# Altium PCB PCB_2021-10-31.pcbdoc
Units mil, origin at the board's own origin, x right, y up, seen from the top; angles counter-clockwise.
Board outline 7210 x 4310 mil, 2 copper layers (Top Layer, Bottom Layer); 61 components, 79 nets, 209 pads, 50 vias.
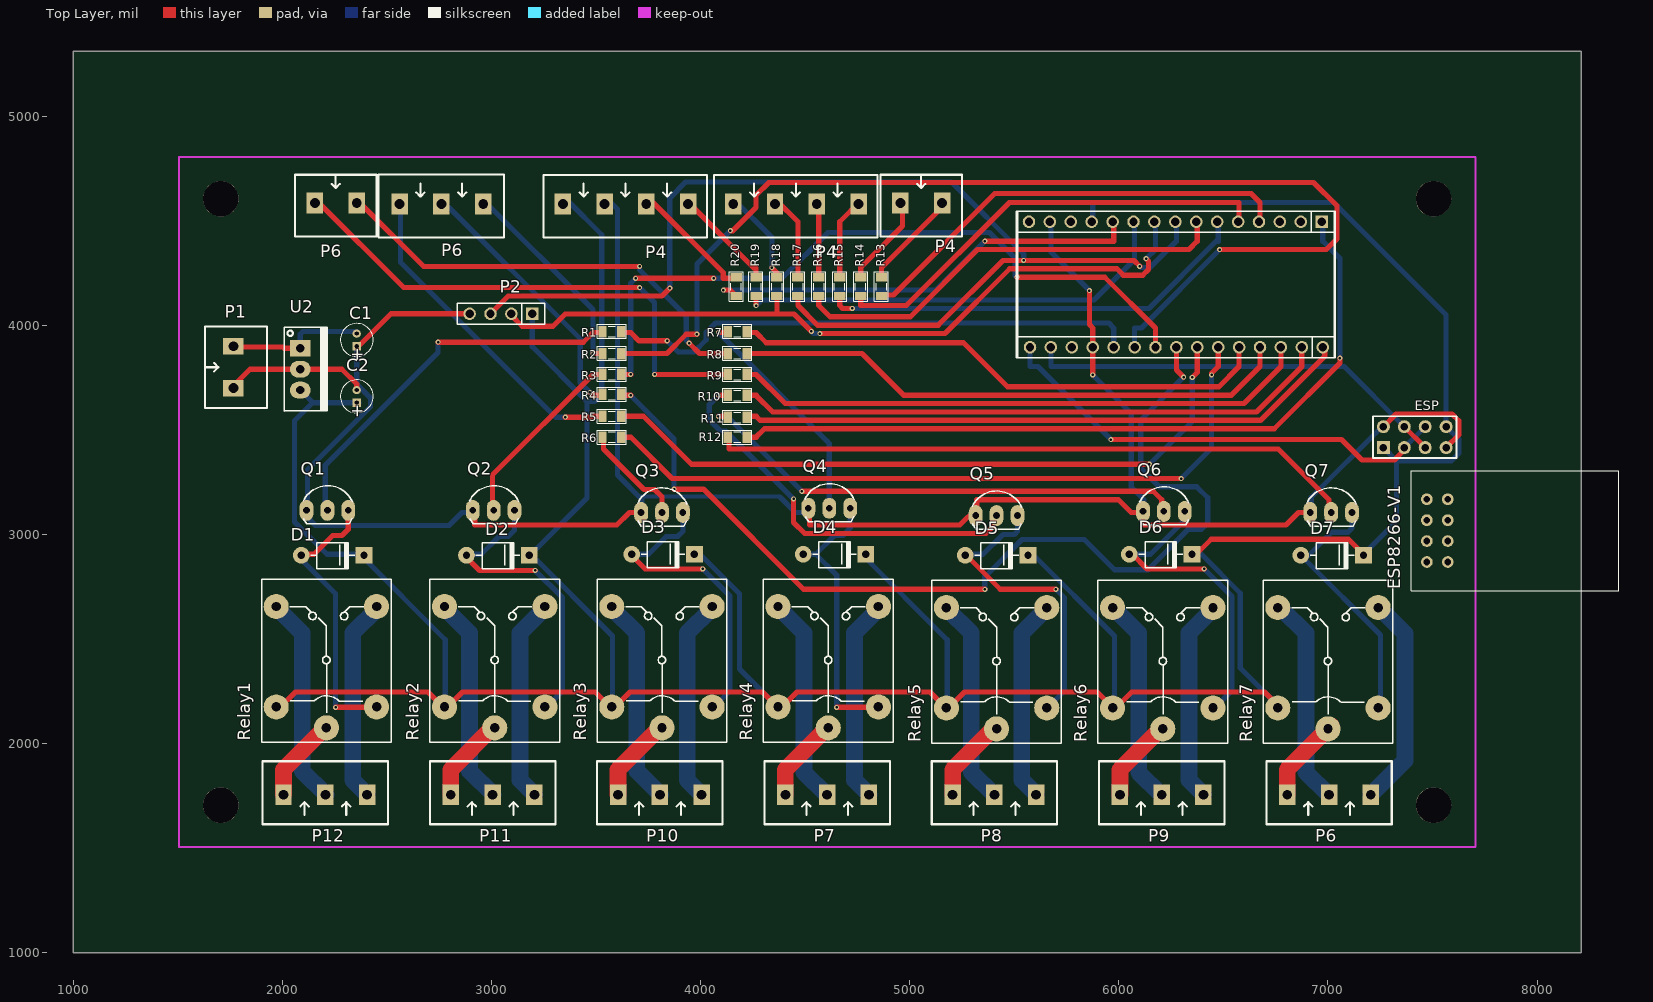
[diagram p0: Top Layer view]
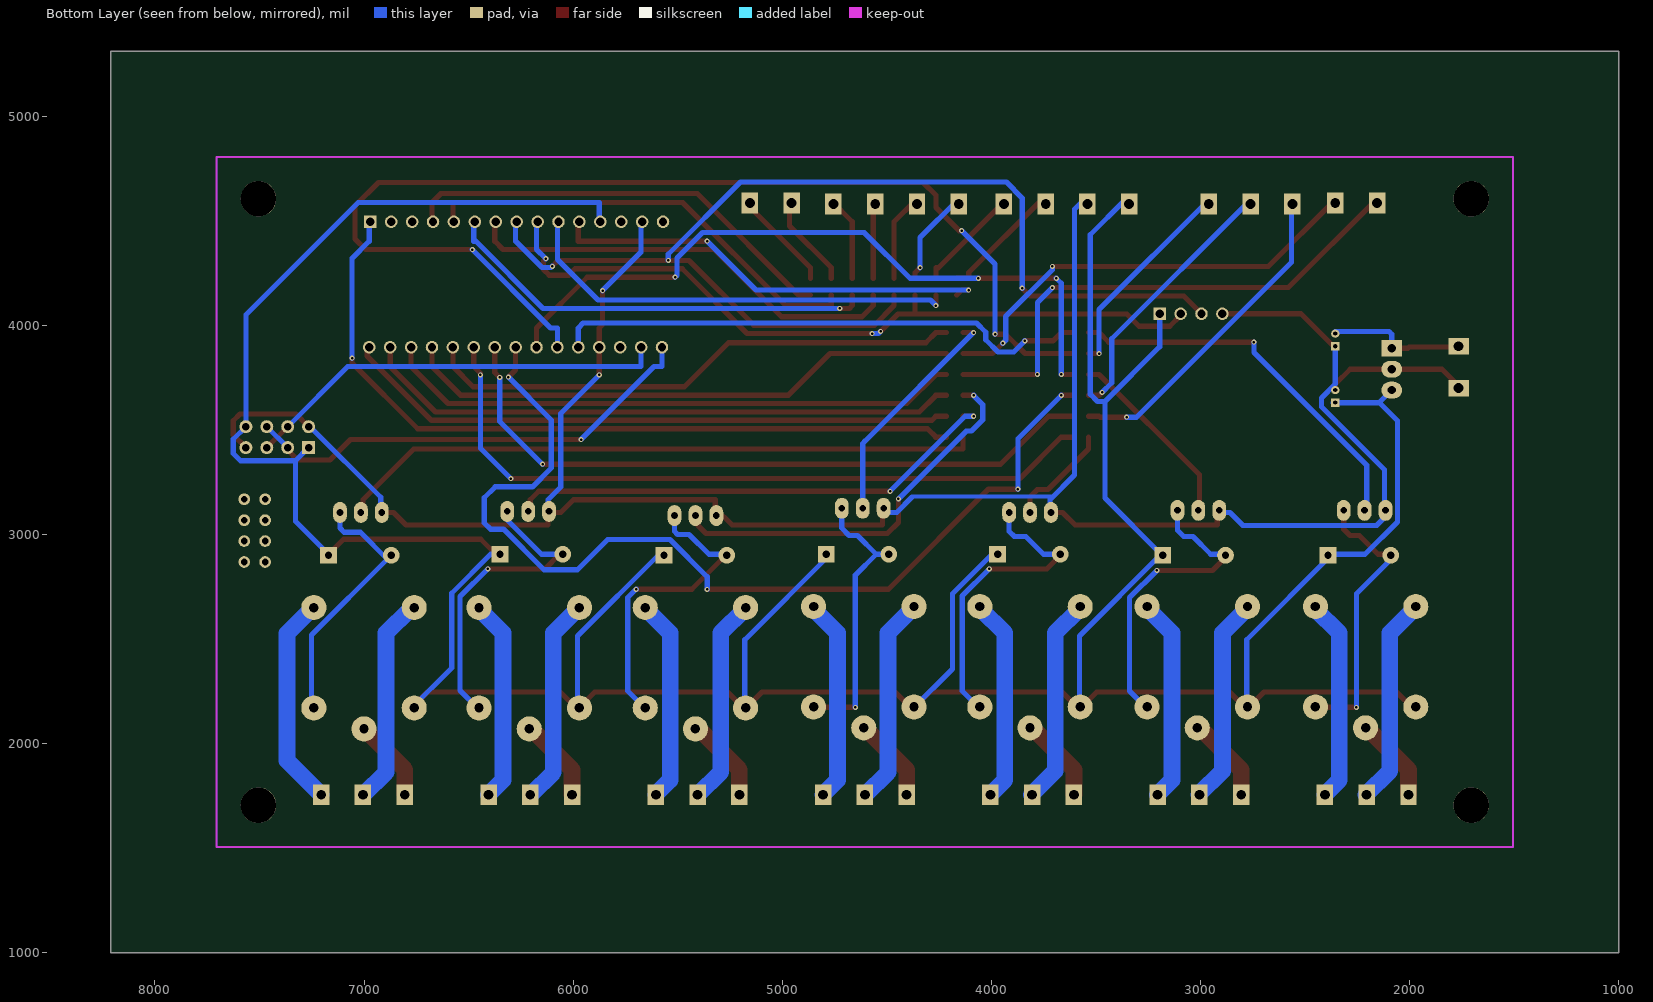
[diagram p1: Bottom Layer view, seen from below]

## Layer stack, top to bottom
Top Solder: solder mask 0.4, Solder Resist, Dk 3.5
Top Layer: signal copper 1.4
Dielectric1: dielectric 12.6, FR-4, Dk 4.8
Bottom Layer: signal copper 1.4
Bottom Solder: solder mask 0.4, Solder Resist, Dk 3.5

## Board outline
8210,1000 1000,1000 1000,5310 8210,5310

## Design rules (kind name [scope] priority, off if disabled: settings)
Clearance [All] p1: gap=10
PolygonConnect [All] p1: connectstyle=Relief reliefconductorwidth=10 reliefentries=4 polygonreliefangle="90 Angle" airgapwidth=10
RoutingVias [All] p1: holewidth=28 width=50 viastyle="Through Hole" minholewidth=28 minwidth=50 maxholewidth=28 maxwidth=50
SolderMaskExpansion [All] p1: expansion=4
Width [All] p1: maxlimit=10 minlimit=10 preferedwidth=10
30 further rules are at their usual default settings.

## Components (designator, comment, footprint, x,y, rotation, side; value= is the part's Value field where it differs from the comment)
C1 "Comment" CA-ALU-4 2355,3930 r90 top
C2 "Comment" CA-ALU-4 2355,3660 r90 top
D1 "Comment" DIO-1A-SMALL 2040,2900 r180 top
D2 "Comment" DIO-1A-SMALL 2830,2900 r180 top
D3 "Comment" DIO-1A-SMALL 3620,2905 r180 top
D4 "Comment" DIO-1A-SMALL 4440,2905 r180 top
D5 "Comment" DIO-1A-SMALL 5215,2900 r180 top
D6 "Comment" DIO-1A-SMALL 6000,2905 r180 top
D7 "Comment" DIO-1A-SMALL 6820,2900 r180 top
ESP "Header2X4P 2.54mm" HDR-4X2/2.54 7265,3415 r0 top
ESP8266-V1 "Comment" ESP8266 7530,3020 r90 top
P1 "Comment" "Medium - Header 2" 1765,3800 r90 top
P2 "Comment" JP4-C1T 3195,4055 r180 top
P4 "Comment" "Medium - Header 2" 5055,4585 r0 top
P4 "Comment" "Medium - Header 4" 4755,4580 r180 top
P4 "Comment" "Medium - Header 4" 3940,4580 r180 top
P6 "Comment" "Medium - Header 2" 2255,4585 r0 top
P6 "Comment" "Medium - Header 3" 2960,4580 r180 top
P6 "Comment" "Medium - Header 3" 6805,1755 r0 top
P7 "Comment" "Medium - Header 3" 4405,1755 r0 top
P8 "Comment" "Medium - Header 3" 5205,1755 r0 top
P9 "Comment" "Medium - Header 3" 6005,1755 r0 top
P10 "Comment" "Medium - Header 3" 3605,1755 r0 top
P11 "Comment" "Medium - Header 3" 2805,1755 r0 top
P12 "Comment" "Medium - Header 3" 2005,1755 r0 top
Q1 "Comment" TO92-123 2215,3115 r0 top
Q2 "Comment" TO92-123 3010,3115 r0 top
Q3 "Comment" TO92-123 3815,3105 r0 top
Q4 "Comment" TO92-123 4615,3125 r0 top
Q5 "Comment" TO92-123 5415,3090 r0 top
Q6 "Comment" TO92-123 6215,3110 r0 top
Q7 "Comment" TO92-123 7015,3105 r0 top
R1 "Comment" RES-SMD-0805 3575,3970 r180 top
R2 "Comment" RES-SMD-0805 3575,3865 r180 top
R3 "Comment" RES-SMD-0805 3575,3765 r180 top
R4 "Comment" RES-SMD-0805 3575,3670 r180 top
R5 "Comment" RES-SMD-0805 3575,3565 r180 top
R6 "Comment" RES-SMD-0805 3575,3465 r180 top
R7 "Comment" RES-SMD-0805 4175,3970 r180 top
R8 "Comment" RES-SMD-0805 4175,3865 r180 top
R9 "Comment" RES-SMD-0805 4175,3765 r180 top
R10 "Comment" RES-SMD-0805 4175,3665 r180 top
R11 "Comment" RES-SMD-0805 4175,3560 r180 top
R12 "Comment" RES-SMD-0805 4175,3465 r180 top
R13 "Comment" RES-SMD-0805 4865,4185 r270 top
R14 "Comment" RES-SMD-0805 4765,4185 r270 top
R15 "Comment" RES-SMD-0805 4665,4185 r270 top
R16 "Comment" RES-SMD-0805 4565,4185 r270 top
R17 "Comment" RES-SMD-0805 4465,4185 r270 top
R18 "Comment" RES-SMD-0805 4365,4185 r270 top
R19 "Comment" RES-SMD-0805 4265,4185 r270 top
R20 "Comment" RES-SMD-0805 4170,4185 r270 top
Relay1 "Comment" "RELAY 5" 2210,2400 r90 top
Relay2 "Comment" "RELAY 5" 3015,2400 r90 top
Relay3 "Comment" "RELAY 5" 3815,2400 r90 top
Relay4 "Comment" "RELAY 5" 4610,2400 r90 top
Relay5 "Comment" "RELAY 5" 5415,2395 r90 top
Relay6 "Comment" "RELAY 5" 6210,2395 r90 top
Relay7 "Comment" "RELAY 5" 7000,2395 r90 top
U2 "Comment" TO220-123 2085,3890 r270 top
? "Comment" "Arduino nano" 6265,4225 r90 top

## Footprints (in the part's own frame and the unit in brackets; to place one, negate y for a bottom-side part, rotate by r counter-clockwise, add the part's x,y. Pads: shape width x height; smd on the part's side, far side on the other; paste and mask are expansions set on the pad)
"Arduino nano" [mm]
  round 1.52 hole 1.02: 3V3(6.858,-15.367) 5V(6.858,10.033) A0(6.858,-10.287) A1(6.858,-7.747) A2(6.858,-5.207) A3(6.858,-2.667) A4(6.858,-0.127) A5(6.858,2.413) A6(6.858,4.953) A7(6.858,7.493) D2(-8.382,7.366) D3(-8.382,4.826) D4(-8.382,2.286) D5(-8.382,-0.254) D6(-8.382,-2.794) D7(-8.382,-5.334) D8(-8.382,-7.874) D9(-8.382,-10.414) D10(-8.382,-12.954) D11(-8.382,-15.494) D12(-8.382,-18.034) GND(-8.382,9.906) GND(6.858,15.113) REF(6.858,-12.827) RST(-8.382,12.446) RST(6.858,12.573) RX0(-8.382,14.986) TX1(-8.382,17.526) VIN(6.858,17.653)
  rect 1.52x1.52 hole 1.02: D13(6.858,-17.907)
  silkscreen extent -9.65,-19.55 8.13,19.18, body extent -9.65,-23.48 8.14,21.44, height 21.18
CA-ALU-4 [mm] "Polarized capacitors, Aluminum Electrolytic Capacitors, 2-Leads, Body 5x11x2x0.5"
  rect 1x1 hole 0.5: 1(-0.762,0)
  round 1 hole 0.5: 2(0.762,0)
  silkscreen extent -2,-2 2,2, body extent -2,-1.97 2,2.03, height 7.5
DIO-1A-SMALL [mil] "Diode 1A, W 100mil, L 350mil"
  round 80 hole 35: 1(-50,0)
  rect 80x80 hole 35: 2(-350,0)
  silkscreen extent -305,-61 -95,65, body extent -366,-61 -34,65, height 122
ESP8266 [mil]
  round 56 hole 32: 1(148,57) 2(48,57) 3(-52,57) 4(-152,57) 5(-152,-43) 6(-52,-43) 7(48,-43) 8(148,-43)
  silkscreen extent -290,-860 285,132, body extent -290,-858 281,118, height 566
HDR-4X2/2.54 [mil]
  rect 62x62 hole 35: 1(0,0)
  round 62 hole 35: 2(0,100) 3(100,0) 4(100,100) 5(200,0) 6(200,100) 7(300,0) 8(300,100)
  silkscreen extent -50,-50 350,150
JP4-C1T [mm] "4 row, straight, gold plating"
  rect 1.52x1.52 hole 1.02: 1(0,0)
  round 1.52 hole 1.02: 2(2.54,0) 3(5.08,0) 4(7.62,0)
  silkscreen extent -1.52,-1.27 9.14,1.27, body extent -1.52,-1.25 9.14,1.25, height 8.51
"Medium - Header 2" [mm]
  rect 2x2.5 hole 1.2: 1(-2.54,0) 2(2.54,0)
  silkscreen extent -4.95,-4.08 4.95,3.43, body extent -5,-4.07 5,3.43, height 10
"Medium - Header 3" [mm]
  rect 2x2.5 hole 1.2: 1(0,0) 2(5.08,0) 3(10.147,0)
  silkscreen extent -2.54,-3.58 12.7,4.06, body extent -2.42,-3.51 12.58,3.99, height 10
"Medium - Header 4" [mm]
  rect 2x2.5 hole 1.2: 1(0,0) 2(5.08,0) 3(10.147,0) 4(15.215,0)
  silkscreen extent -2.29,-3.53 17.58,4.06, body extent -2.36,-3.43 17.64,4.07, height 10
"RELAY 5" [mil] "Reley DPDT, 8 pin, 1A, W400mil, L800mil,H 300mil"
  round 120 hole 45: 1(-325,0) 2(255,240) 3(255,-240) 4(-225,-240) 5(-225,240)
  silkscreen extent -395,-310 385,310, body extent -371,-304 381,306, height 602
RES-SMD-0805 [mil]
  rect 39.37x55 smd: 1(-45,0) 2(45,0)
  silkscreen extent -70,-34 70,33, body extent -39,-25 39,25, height 31
TO92-123 [mil] "TO-92"
  oval 66x100 hole 32: 1(-100,0) 2(0,0) 3(100,0)
  silkscreen extent -117,-65 120,118, body extent -109,-66 109,95, height 245
TO220-123 [mil] "TO-220 - 1-2-3"
  rect 80x100 hole 39: 1(0,0)
  oval 80x100 hole 39: 2(100,0) 3(200,0)
  silkscreen extent -100,-76 300,130, body extent -95,-80 295,97, height 323

## Free pads (board coordinates)
  round 170 hole 170 unplated: ""(1705,1705) ""(1705,4605) ""(7505,1705) ""(7505,4605)

## Via types
v1: diameter 24, hole 12, Top Layer to Bottom Layer, 50 vias

## Nets (pads, with @x,y where several pads share a name; then routed paths per layer and width w, separated by ;. In a path a pad name is that pad's centre, name@x,y a point inside that pad or via, vN(x,y) a via of type N, cw(c..) or ccw(c..) an arc to the next point about the centre after c; other vN are vias at no path point)
$BOARDOUTLINENET: 
+5V: ESP.1 ESP.8 | length 18924.6
  Top Layer w25: 1978.8,2163.7 2062,2246.9 2695.6,2246.9 2778.8,2163.7 2861.4,2246.3 3496.2,2246.3 3578.8,2163.7 3661.4,2246.3 4296.2,2246.3 4378.8,2163.7 4461.4,2246.3 5096.2,2246.3 5178.8,2163.7 5261.4,2246.3 5896.2,2246.3 5978.8,2163.7 6061.4,2246.3 6696.2,2246.3 6778.8,2163.7 ; 6370,2905 6442,2977 7098,2977 7170,2905
  Bottom Layer w25: 2085,3690 2145,3630 ; 2365,3630 2145,3630 ; 2778.8,2163.7 2778.8,2496.2 2370,2905 2213.2,2905 2058.2,3060 2058.2,3543.2 2145,3630 ; 3170,2905 3188,2905 ; 3195,4055 3195,3897.3 3456.7,3635.6 ; 3365,4595 3526.7,4433.3 3526.7,3670.6 3491.7,3635.6 3456.7,3635.6 ; 3578.8,2163.7 3578.8,2514.2 3188,2905 ; 3970,2905 3996.5,2905 4185.6,2716 4185.6,2356.9 4378.8,2163.7 ; 4770,2905 5178.8,2496.2 5178.8,2163.7 ; 5570,2905 5588,2905 5978.8,2514.2 5978.8,2163.7 ; 5875,4494.9 5875,4587.5 7027.8,4587.5 7565,4050.3 ESP.8 7625,3455 7625,3386.4 7590.7,3352.1 7327.9,3352.1 ; 6370,2905 6394.6,2905 6580.8,2718.8 6580.8,2361.7 6778.8,2163.7 ; 7170,2905 7327.9,3062.9 7327.9,3352.1 ; ESP.1 7327.9,3352.1 ; 3188,2905 3456.7,3173.7 3456.7,3635.6
GND: ESP.2 ESP.7 | length 11741.7
  Top Layer w25: 1755,3700 1845,3790 2283.7,3790 2355,3718.7 2355,3690 ; 2355,3891.2 2518.8,4055 2895,4055 ; 2920,3105 2920,3044.4 3598.8,3044.4 3659.4,3105 3720,3105 ; 4520,3105 4520,3044.4 5239.1,3044.4 5320,3125.3 ; 5320,3105 5320,3125.3 ; v1(5859,4165.7) 5859,4003.5 5875,3987.5 v1(5875,3762.3) ; 6920,3105 6859.4,3105 6798.8,3044.4 6120,3044.4 6120,3105 6059.4,3105 5998.8,3165.6 5320,3165.6 5320,3125.3 ; ESP.2 7325.9,3575.9 7592.8,3575.9 7625,3543.6 7625,3475 ESP.7
  Bottom Layer w20: 3705,3180.6 4376.5,3180.6
  Bottom Layer w25: 2355,3891.2 2355,3718.7 2421.3,3652.4 2421.3,3610.1 2120,3308.8 2120,3080 2157.2,3042.8 2797.2,3042.8 2859.4,3105 2920,3105 ; 3561.8,4595 3601.9,4554.9 3601.9,3283.7 3720,3165.6 3720,3105 ; 4378.55,3178.55 4452.1,3105 4520,3105 ; 5675,4494.9 5675,4349.8 v1(5859,4165.7) ; v1(5875,3762.3) 6059.2,3578 6059.2,3226.4 6120,3165.6 6120,3105 ; 6920,3105 6920,3177.5 7257.5,3515 ESP.2
R1_1:  | length 1847.1
  Top Layer w25: v1(2744.3,3919) 3438.6,3919 3484.6,3965 3535,3965
  Bottom Layer w25: 2205,3105 2205,3331.2 2744.3,3870.5 v1(2744.3,3919)
R2_1:  | length 995.6
  Top Layer w25: v1(3484.6,3865) 3535,3865
  Bottom Layer w25: 2965,4595 3484.6,4075.4 v1(3484.6,3865)
R3_1:  | length 909.1
  Top Layer w25: 3005,3105 3005,3285.4 3484.6,3765 3535,3765
R4_1:  | length 1278.8
  Top Layer w25: v1(3470.1,3679) 3470.6,3679 3484.6,3665 3535,3665
  Bottom Layer w25: 2765,4595 3424.2,3935.8 3424.2,3724.9 v1(3470.1,3679)
R5_1:  | length 1572.7
  Top Layer w25: v1(3352.8,3560.3) 3479.9,3560.3 3484.6,3565 3535,3565
  Bottom Layer w25: 2565,4595 2565,4301.1 3305.9,3560.3 v1(3352.8,3560.3)
R6_1:  | length 506.1
  Top Layer w25: 3535,3465 3535,3408.5 3728.5,3215 3780,3215 3815,3180 3815,3105
R7_1:  | length 1116.9
  Top Layer w25: v1(4084.9,3965) 4135,3965
  Bottom Layer w25: v1(4084.9,3965) 4605,3444.9 ; 4599.9,3450 4615,3434.9 4615,3125
R8_1:  | length 2151.8
  Top Layer w25: 2361.8,4595 2675.4,4281.4 v1(3708,4281.4) ; v1(3945,3914.2) 3994.2,3865 4135,3865
  Bottom Layer w25: v1(3708,4281.4) 3708,4265.5 3931.5,4042 3931.5,3927.7 v1(3945,3914.2)
R9_1:  | length 2515
  Top Layer w25: 2165,4595 2579.9,4180.1 v1(3708,4180.1) ; v1(3779.7,3765) 4135,3765
  Bottom Layer w25: v1(3708,4180.1) 3779.7,4108.4 v1(3779.7,3765)
R10_1:  | length 1917.1
  Top Layer w25: v1(4084.6,3665) 4135,3665 ; v1(4444.4,3169.4) 4444.4,3057.2 4497.5,3004.2 5364.8,3004.2 5405,3044.4 5405,3105
  Bottom Layer w25: v1(4084.6,3665) 4041.5,3621.8 4041.5,3547.7 4094.7,3494.5 4119.4,3494.5 v1(4444.4,3169.4)
R11_1:  | length 2396
  Top Layer w25: v1(4085,3565) 4135,3565 ; v1(4484.2,3206) 6164.6,3206 6205,3165.6 6205,3105
  Bottom Layer w25: v1(4085,3565) 4125.2,3565 v1(4484.2,3206)
R12_1:  | length 3087.7
  Top Layer w25: 4135,3465 4135,3408.5 6762.1,3408.5 7005,3165.6 7005,3105
R13_2:  | length 494.3
  Top Layer w25: 4865,4225 4865,4275.4 5165,4575.4 5165,4595
R14_2:  | length 452.8
  Top Layer w25: 4765,4225 4765,4275.4 4965,4475.4 4965,4595
R15_2:  | length 411.4
  Top Layer w25: 4665,4225 4665,4495 4765,4595
R16_2:  | length 370
  Top Layer w25: 4565,4225 4565,4595
R17_2:  | length 411.4
  Top Layer w25: 4365,4595 4465,4495 4465,4225
R18_2:  | length 452.8
  Top Layer w25: v1(4340.7,4275.3) 4365,4250.9 4365,4225
  Bottom Layer w25: 4165,4595 4340.7,4419.3 v1(4340.7,4275.3)
R19_2:  | length 501.6
  Top Layer w25: 3965,4595 3965,4562.8 4252.4,4275.4 4265,4275.4 4265,4225
R20_2:  | length 568.8
  Top Layer w25: 3765,4595 4108.5,4251.5 4108.5,4225 4165,4225
RELAY1_1:  | length 1400.9
  Top Layer w25: 2065,2905 2150.6,2905 2240.6,2995 2285,2995 2315,3025 2315,3115 ; v1(2254.1,2173.1) 2441.8,2173.1 2451.2,2163.7
  Bottom Layer w25: 2065,2905 2254.1,2715.9 v1(2254.1,2173.1)
RELAY1_2:  | length 965.7
  Bottom Layer w80: 2405,1755 2335.6,1824.4 2335.6,2528.4 2451.2,2644.1
RELAY1_3:  | length 984.1
  Bottom Layer w80: 1978.8,2644.1 2094.4,2528.5 2094.4,1868.8 2208.2,1755
RELAY1_5:  | length 417
  Top Layer w80: 2005,1755 2005,1875 2215,2085
RELAY2_1:  | length 1507.4
  Top Layer w25: 2865,2905 2942.1,2827.9 v1(3208.4,2827.9)
  Bottom Layer w25: 2865,2905 2950.6,2905 3035.6,2990 3080,2990 3110,3020 3110,3105 ; v1(3208.4,2827.9) 3338.7,2697.5 3338.7,2251.2 3251.2,2163.7
RELAY2_2:  | length 965.7
  Bottom Layer w80: 3205,1755 3135.6,1824.4 3135.6,2528.4 3251.2,2644.1
RELAY2_3:  | length 984.1
  Bottom Layer w80: 2778.8,2644.1 2894.4,2528.5 2894.4,1868.8 3008.2,1755
RELAY2_5:  | length 417
  Top Layer w80: 2805,1755 2805,1875 3015,2085
RELAY3_1:  | length 1520.9
  Top Layer w25: 3665,2905 3735.1,2834.9 v1(4009.9,2834.9)
  Bottom Layer w25: 3665,2905 3750.6,2905 3835.6,2990 3890,2990 3915,3015 3915,3105 ; v1(4009.9,2834.9) 4139.5,2705.2 4139.5,2252 4051.2,2163.7
RELAY3_2:  | length 965.7
  Bottom Layer w80: 4005,1755 3935.6,1824.4 3935.6,2528.4 4051.2,2644.1
RELAY3_3:  | length 984.1
  Bottom Layer w80: 3578.8,2644.1 3694.4,2528.5 3694.4,1868.8 3808.2,1755
RELAY3_5:  | length 417
  Top Layer w80: 3605,1755 3605,1875 3815,2085
RELAY4_1:  | length 1374.8
  Top Layer w25: v1(4650.3,2173.1) 4841.8,2173.1 4851.2,2163.7
  Bottom Layer w25: 4465,2905 4550.6,2905 ; v1(4650.3,2173.1) 4650.3,2805.3 4550.6,2905 ; 4715,3125 4715,3030 4680,2995 4640.6,2995 4550.6,2905
RELAY4_2:  | length 965.7
  Bottom Layer w80: 4805,1755 4735.6,1824.4 4735.6,2528.4 4851.2,2644.1
RELAY4_3:  | length 981.5
  Bottom Layer w80: 4378.8,2644.1 4494.4,2528.5 4494.4,1862.4 4601.8,1755
RELAY4_5:  | length 417
  Top Layer w80: 4405,1755 4405,1875 4615,2085
RELAY5_1:  | length 1500.3
  Top Layer w25: 5265,2905 5432.4,2737.6 v1(5698.6,2737.6)
  Bottom Layer w25: 5265,2905 5350.6,2905 5445.6,3000 5500,3000 5515,3015 5515,3090 ; 5651.2,2163.7 5738.7,2251.2 5738.7,2697.5 v1(5698.6,2737.6)
RELAY5_2:  | length 965.7
  Bottom Layer w80: 5605,1755 5535.6,1824.4 5535.6,2528.4 5651.2,2644.1
RELAY5_3:  | length 981.5
  Bottom Layer w80: 5178.8,2644.1 5294.4,2528.5 5294.4,1862.4 5401.8,1755
RELAY5_5:  | length 417
  Top Layer w80: 5205,1755 5205,1875 5415,2085
RELAY6_1:  | length 1479
  Top Layer w25: 6065,2905 6135.1,2834.9 v1(6408,2834.9)
  Bottom Layer w25: 6065,2905 6150.6,2905 6315,3069.4 6315,3095 ; v1(6408,2834.9) 6540.7,2702.2 6540.7,2253.2 6451.2,2163.7
RELAY6_2:  | length 965.7
  Bottom Layer w80: 6405,1755 6335.6,1824.4 6335.6,2528.4 6451.2,2644.1
RELAY6_3:  | length 981.5
  Bottom Layer w80: 5978.8,2644.1 6094.4,2528.5 6094.4,1862.4 6201.8,1755
RELAY6_5:  | length 417
  Top Layer w80: 6005,1755 6005,1875 6215,2085
RELAY7_1:  | length 1264.1
  Bottom Layer w25: 6865,2905 6888.8,2881.2 ; 7115,3105 7115,3030 7095,3010 7017.6,3010 6888.8,2881.2 ; 7251.2,2163.7 7251.2,2518.8 6888.8,2881.2
RELAY7_2:  | length 1005.2
  Bottom Layer w80: 7205,1755 7368.2,1918.1 7368.2,2527.1 7251.2,2644.1
RELAY7_3:  | length 981.5
  Bottom Layer w80: 6778.8,2644.1 6894.4,2528.5 6894.4,1862.4 7001.8,1755
RELAY7_5:  | length 417
  Top Layer w80: 6805,1755 6805,1875 7015,2085
U1_1: ESP.3 ESP.6 | length 2240.9
  Top Layer w25: v1(5961.9,3453.5) 7064.2,3453.5 7162.4,3355.3 7317.4,3355.3 7365,3402.9 ESP.3
  Bottom Layer w25: 5575.1,3895 5575.1,3802.4 5613,3802.4 v1(5961.9,3453.5) ; ESP.3 ESP.6
U1_2: ESP.4 ESP.5 | length 2043
  Top Layer w25: ESP.4 ESP.5
  Bottom Layer w25: 5675,3894.9 5675,3802.4 7077.6,3802.4 ESP.4
U1_3: 
U1_5:  | length 2578.3
  Top Layer w25: 3615,3965 3665.4,3965 3704.8,3925.6 v1(3839.8,3925.6)
  Bottom Layer w25: v1(3839.8,3925.6) 3893,3872.5 3967.9,3872.5 4026.6,3931.2 4026.6,3966.5 4070.6,4010.5 5952,4010.5 5975,3987.5 5975,3894.9
U1_6:  | length 5439.1
  Top Layer w25: 3615,3865 3839,3865 3931.1,3957.2 v1(3982.3,3957.2) ; v1(4142.2,4452.5) 4154.7,4452.5 4265,4562.8 4265,4622.2 4326.1,4683.4 6930.6,4683.4 7042.6,4571.3 7042.6,4412.9 6991.5,4361.9 v1(6482.1,4361.9)
  Bottom Layer w25: v1(3982.3,3957.2) 3982.3,4292.5 v1(4142.2,4452.5) ; 6075,3894.9 6075,3987.5 6107.7,3987.5 v1(6482.1,4361.9)
U1_7:  | length 3427.4
  Top Layer w25: 3615,3765 v1(3665.4,3765) ; v1(3689.3,4224.9) v1(4062.2,4224.9) ; v1(5512.2,4229.9) 5932.6,4229.9 6175,3987.5 6175,3894.9
  Bottom Layer w25: v1(3665.4,3765) 3665.4,4201 v1(3689.3,4224.9) ; v1(4062.2,4224.9) 4388.8,4224.9 4608.1,4444.3 5381,4444.3 5503.3,4322 5503.3,4238.8 v1(5512.2,4229.9)
U1_8:  | length 4797.7
  Top Layer w25: 3615,3665 v1(3665.4,3665) ; v1(3872.8,3216.3) 4013.6,3216.3 4492.2,2737.6 v1(5358.7,2737.6) ; 6275,3894.9 6275,3786 v1(6309.1,3751.9)
  Bottom Layer w25: v1(3665.4,3665) 3872.8,3457.6 v1(3872.8,3216.3) ; v1(5358.7,2737.6) 5358.7,2797 5537.2,2975.4 5834.7,2975.4 5979.5,2830.6 6139.3,2830.6 6333.7,3025 6395,3025 6425,3055 6425,3175 6372.7,3227.3 6276.9,3227.3 6194.4,3227.3 6104.4,3317.4 6104.4,3547.2 v1(6309.1,3751.9)
U1_9:  | length 3280.1
  Top Layer w25: 3615,3565 3726.4,3565 3955.6,3335.8 v1(6146.4,3335.8) ; v1(6350.9,3750.8) 6375,3775 6375,3894.9
  Bottom Layer w25: v1(6146.4,3335.8) 6350.9,3540.3 v1(6350.9,3750.8)
U1_10:  | length 3466.3
  Top Layer w25: 3615,3465 3665.4,3465 3863.4,3267 v1(6298.2,3267) ; v1(6443,3762.3) 6443,3770.4 6475,3802.4 6475,3894.9
  Bottom Layer w25: v1(6298.2,3267) 6443,3411.8 v1(6443,3762.3)
U1_11:  | length 2599.8
  Top Layer w25: 4215,3965 4265.4,3965 4313.6,3916.8 5256.9,3916.8 5467.8,3705.9 6478.5,3705.9 6575,3802.4 6575,3894.9
U1_12:  | length 2691.6
  Top Layer w25: 4215,3865 4771.5,3865 4970.7,3665.8 6538.4,3665.8 6675,3802.4 6675,3894.9
U1_13:  | length 2783.4
  Top Layer w25: 4215,3765 4265.4,3765 4404.7,3625.7 6598.3,3625.7 6775,3802.4 6775,3894.9
U1_14:  | length 2875.3
  Top Layer w25: 4215,3665 4265.4,3665 4344.9,3585.5 6658.1,3585.5 6875,3802.4 6875,3894.9
U1_15:  | length 2947.7
  Top Layer w25: 4215,3565 4265.4,3565 4285,3545.4 6677.9,3545.4 6985,3852.5 6985,3894.9
U1_16:  | length 3698.8
  Top Layer w25: 4215,3465 4265.4,3465 4305.7,3505.3 6743.4,3505.3 7057.3,3819.2 v1(7057.3,3842.5)
  Bottom Layer w25: 6975,4494.9 6975,4402.4 7057.3,4320.1 v1(7057.3,3842.5)
U1_17: 
U1_18: 
U1_19:  | length 2121
  Top Layer w25: 4865,4145 4921.5,4145 5406.4,4629.9 6632.6,4629.9 6675,4587.5 6675,4494.9
U1_20:  | length 2157.2
  Top Layer w25: 4765,4145 4765,4094.6 4983.2,4094.6 5476.1,4587.5 6575,4587.5 6575,4494.9
U1_21:  | length 2092
  Top Layer w25: 4665,4145 4665,4094.6 4679,4080.6 v1(4724.9,4080.6)
  Bottom Layer w25: v1(4724.9,4080.6) 6144.1,4080.6 6465.9,4402.4 6475,4402.4 6475,4494.9
U1_22:  | length 2125.2
  Top Layer w25: 4565,4145 4565,4094.6 4619.1,4040.5 5002.8,4040.5 5324.6,4362.3 6334.9,4362.3 6375,4402.4 6375,4494.9
U1_23:  | length 5422.5
  Top Layer w25: 2995,4055 3080,4140 3815,4140 v1(3852.6,4177.6) ; 4465,4145 4465,4094.6 4559.2,4000.4 5135.7,4000.4 5445.5,4310.2 v1(5544.8,4310.2) 6071.6,4310.2 v1(6099.5,4282.2)
  Bottom Layer w25: v1(3852.6,4177.6) 3852.6,4609.2 3928,4684.6 5199.9,4684.6 5544.8,4339.6 v1(5544.8,4310.2) ; v1(6099.5,4282.2) 6105.6,4276.1 6148.8,4276.1 6275,4402.4 6275,4494.9
U1_24:  | length 3634
  Top Layer w25: 3095,4055 3095,4046.5 3146.4,3995.1 3293.7,3995.1 3352.1,4053.5 4365,4053.5 ; 4365,4145 4365,4094.6 4365,4053.5 ; v1(4529.9,3970.4) 4446.9,4053.5 4365,4053.5 ; v1(4570.2,3960.3) 5168.5,3960.3 5478.3,4270.1 5990.3,4270.1 6021.3,4239.1 6113.7,4239.1 6141.1,4266.5 6141.1,4307.7 v1(6130.4,4318.4)
  Bottom Layer w25: v1(4529.9,3970.4) 4540.1,3960.3 v1(4570.2,3960.3) ; v1(6130.4,4318.4) 6175,4362.9 6175,4494.9
U1_25:  | length 2131.9
  Top Layer w25: v1(4265,4094.6) 4265,4145
  Bottom Layer w25: v1(4265,4094.6) 4291.2,4120.8 5881.4,4120.8 6075,4314.4 6075,4494.9
U1_26:  | length 2121.5
  Top Layer w25: v1(4108.8,4168.5) 4141.5,4168.5 4165,4145 ; v1(5359.4,4402.4) 5975,4402.4 5975,4494.9
  Bottom Layer w25: v1(4108.8,4168.5) 5125.5,4168.5 v1(5359.4,4402.4)
U1_28: 
U1_30: 
U2_1:  | length 675.2
  Top Layer w25: 1755,3896.8 2001.4,3896.8 2008.2,3890 2085,3890
  Bottom Layer w25: 2085,3890 2085,3957 2098,3970 2355,3970
pads on no net: ?.3V3 ?.5V ?.A0 ?.A1 ?.A2 ?.A3 ?.A4 ?.A5 ?.A6 ?.A7 ?.D2 ?.D3 ?.D4 ?.D5 ?.D6 ?.D7 ?.D8 ?.D9 ?.D10 ?.D11 ?.D12 ?.D13 ?.GND ?.REF ?.RST ?.RX0 ?.TX1 ?.VIN C1.1 C1.2 C2.1 C2.2 D1.1 D1.2 D2.1 D2.2 D3.1 D3.2 D4.1 D4.2 D5.1 D5.2 D6.1 D6.2 D7.1 D7.2 ESP8266-V1.1 ESP8266-V1.2 ESP8266-V1.3 ESP8266-V1.4 ESP8266-V1.5 ESP8266-V1.6 ESP8266-V1.7 ESP8266-V1.8 P1.1 P1.2 P2.1 P2.2 P2.3 P2.4 P4.1 P4.2 P4.3 P4.4 P6.1 P6.2 P6.3 P7.1 P7.2 P7.3 P8.1 P8.2 P8.3 P9.1 P9.2 P9.3 P10.1 P10.2 P10.3 P11.1 P11.2 P11.3 P12.1 P12.2 P12.3 Q1.1 Q1.2 Q1.3 Q2.1 Q2.2 Q2.3 Q3.1 Q3.2 Q3.3 Q4.1 Q4.2 Q4.3 Q5.1 Q5.2 Q5.3 Q6.1 Q6.2 Q6.3 Q7.1 Q7.2 Q7.3 R1.1 R1.2 R2.1 R2.2 R3.1 R3.2 R4.1 R4.2 R5.1 R5.2 R6.1 R6.2 R7.1 R7.2 R8.1 R8.2 R9.1 R9.2 R10.1 R10.2 R11.1 R11.2 R12.1 R12.2 R13.1 R13.2 R14.1 R14.2 R15.1 R15.2 R16.1 R16.2 R17.1 R17.2 R18.1 R18.2 R19.1 R19.2 R20.1 R20.2 Relay1.1 Relay1.2 Relay1.3 Relay1.4 Relay1.5 Relay2.1 Relay2.2 Relay2.3 Relay2.4 Relay2.5 Relay3.1 Relay3.2 Relay3.3 Relay3.4 Relay3.5 Relay4.1 Relay4.2 Relay4.3 Relay4.4 Relay4.5 Relay5.1 Relay5.2 Relay5.3 Relay5.4 Relay5.5 Relay6.1 Relay6.2 Relay6.3 Relay6.4 Relay6.5 Relay7.1 Relay7.2 Relay7.3 Relay7.4 Relay7.5 U2.1 U2.2 U2.3
copper on no net: | length 2.9
  Bottom Layer w10: 4376.5,3180.6 4378.55,3178.55

## Polygon pours and split planes (outlines as drawn)
GND on Bottom Layer "Bottom Layer-GND" (solid, pour order 0): 1505,4805 7705,4805 7705,1505 1505,1505
GND on Top Layer "Top Layer-GND" (solid, pour order 2): 7705,4805 7705,1505 1505,1505 1505,4805

## Text inside footprints (layer, text, board x,y; h text height)
C1: Top Overlay "+" at 2385,3825 h59.06 r90
C2: Top Overlay "+" at 2385,3555 h59.06 r90